# Altium PCB CW308T_PIC24FJ.PcbDoc
Units mil, origin at the board's own origin, x right, y up, seen from the top; angles counter-clockwise.
Board outline 2060 x 2540 mil, 2 copper layers (Top Layer, Bottom Layer); 9 components, 16 nets, 111 pads, 8 vias.
Unrouted connection lines stored in the file: 28.
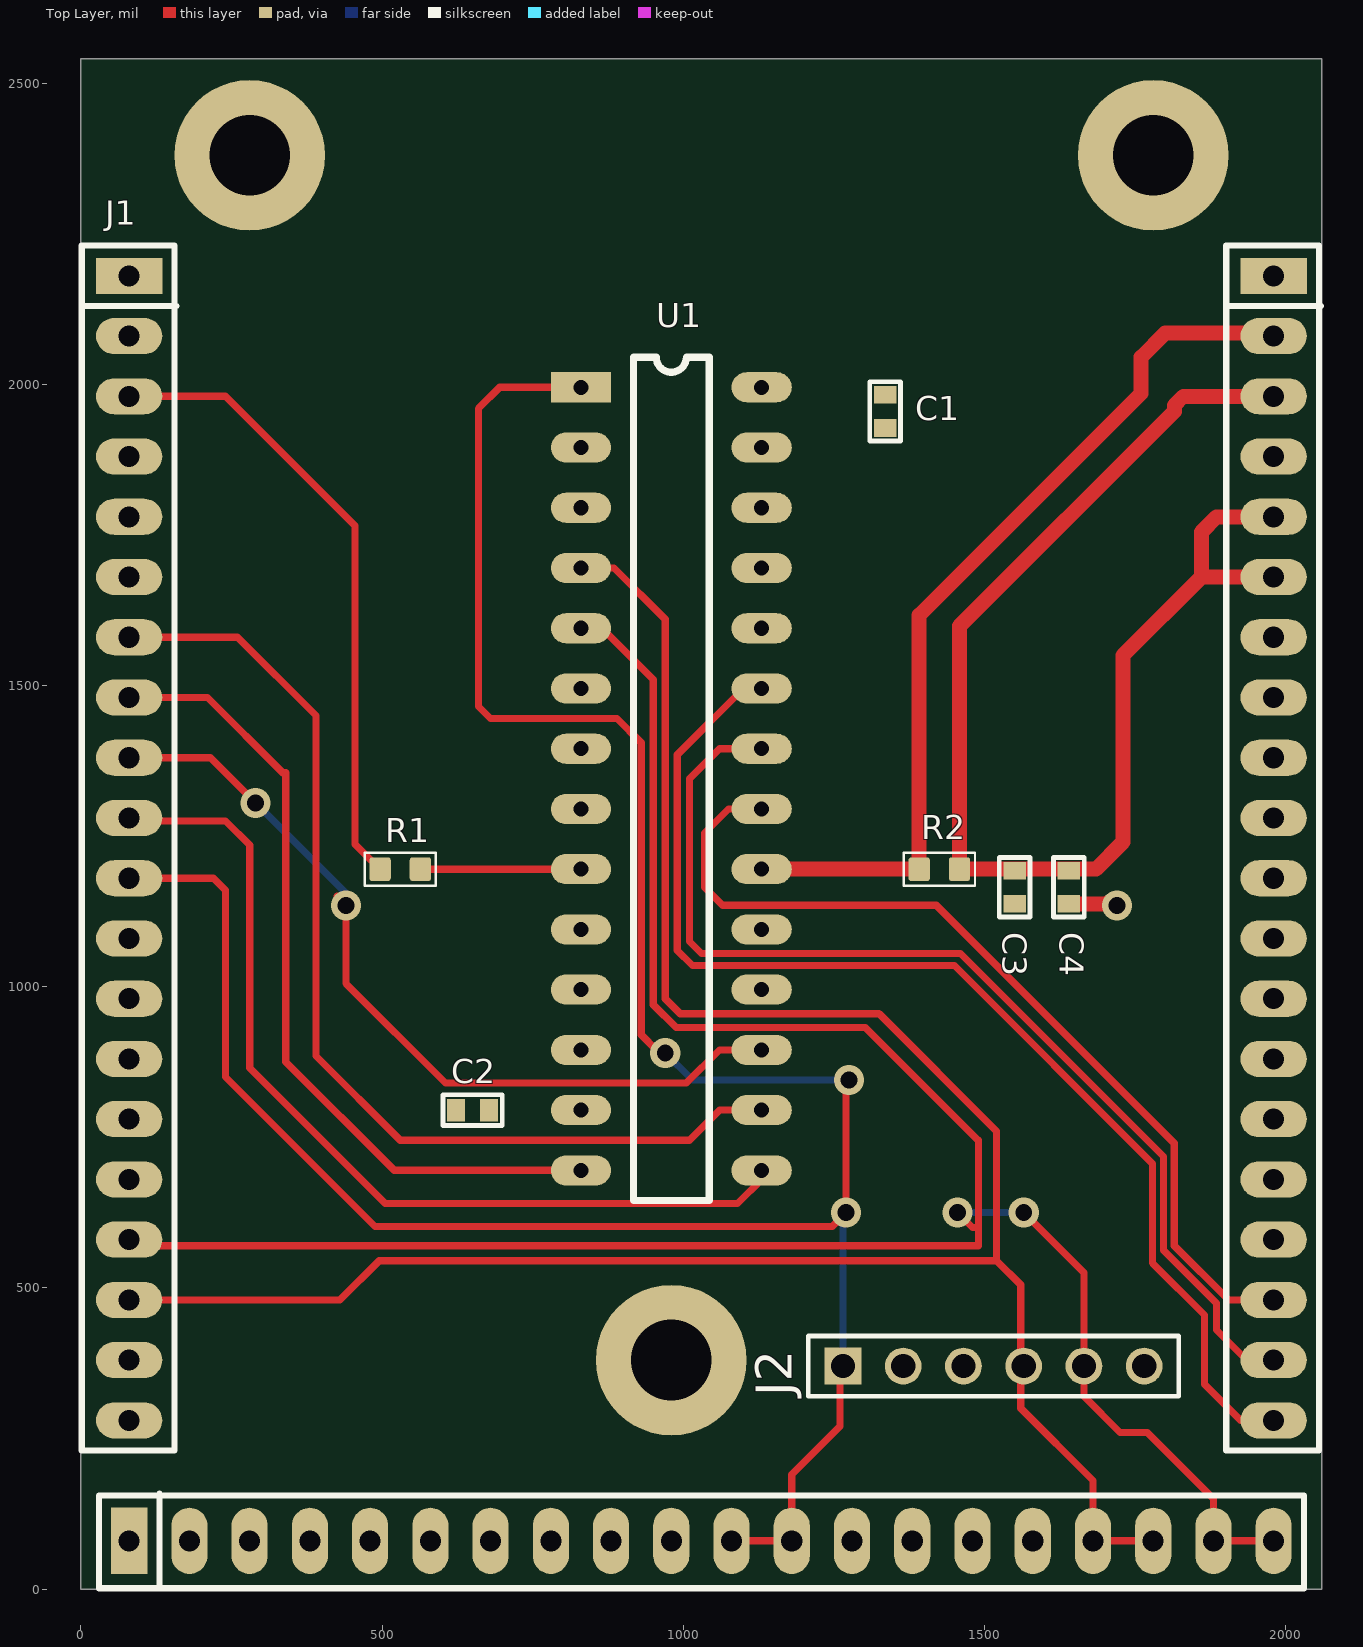
[diagram p0: Top Layer view]
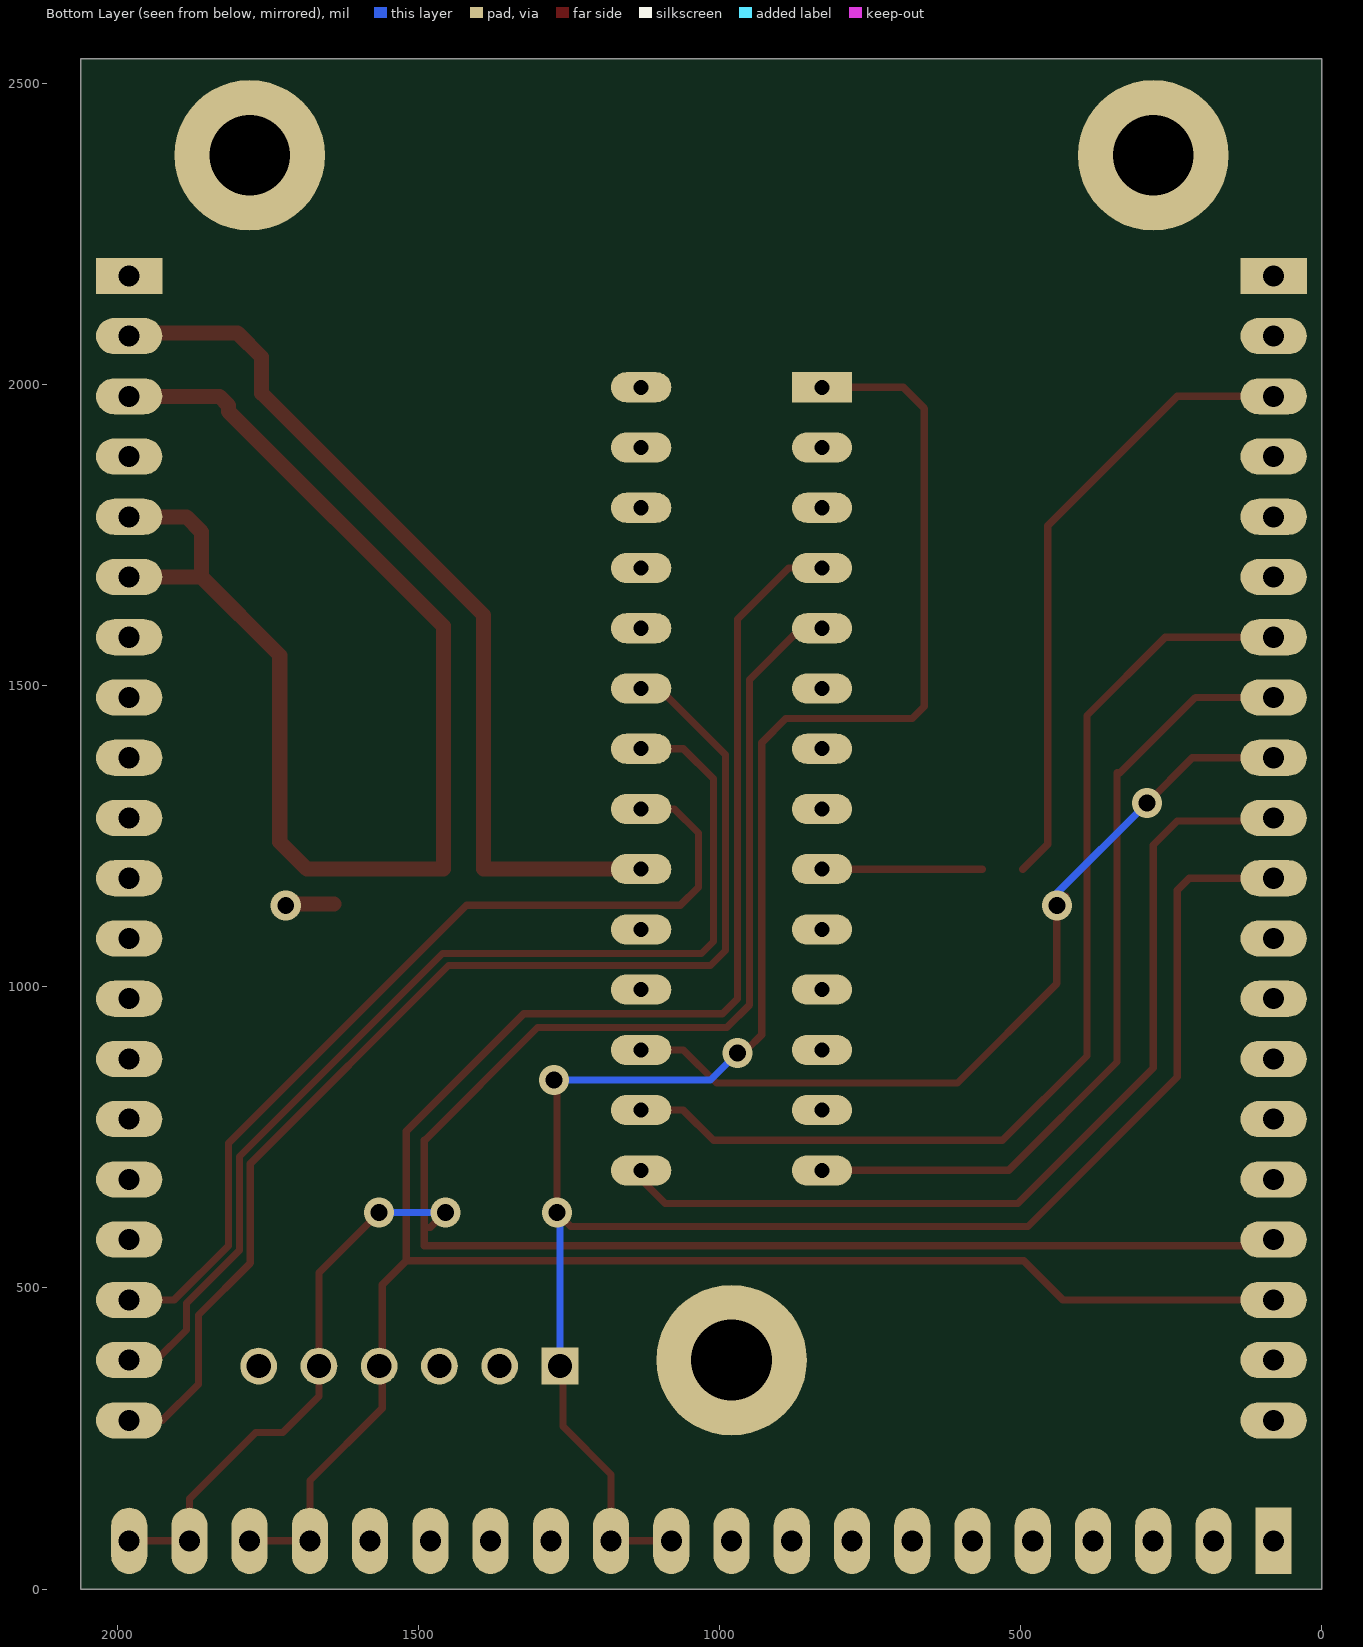
[diagram p1: Bottom Layer view, seen from below]

## Layer stack, top to bottom
Top Solder: solder mask 0.4, Solder Resist, Dk 3.5
Top Layer: signal copper 1.4
Dielectric 1: dielectric 12.6, FR-4, Dk 4.8
Bottom Layer: signal copper 1.4
Bottom Solder: solder mask 0.4, Solder Resist, Dk 3.5

## Board outline
0,0 2060,0 2060,2540 0,2540

## Design rules (kind name [scope] priority, off if disabled: settings)
BoardOutlineClearance [All] p1: gap=15 ignorepadtopadclearanceinfootprint=FALSE except(0: Arc-SplitContinuation Track-SplitContinuation SMDPad-SplitContinuation THPad-SplitContinuation Via-SplitContinuation Fill-SplitContinuation Poly-SplitContinuation Region-SplitContinuation Text-SplitContinuation)
Clearance [All] p1: gap=6 ignorepadtopadclearanceinfootprint=FALSE except(0: Arc-Hole Track-Hole SMDPad-Hole THPad-Hole Via-Hole Fill-Hole Poly-Hole Region-Hole Text-Hole)
HoleSize [All] p1: absolutevalues=TRUE maxlimit=200 minlimit=1 maxpercent=80.000 minpercent=20.000
MinimumSolderMaskSliver [All] p1: minsoldermaskwidth=5
PlaneConnect PlaneConnect_viaDirect [IsVia] p1: planeconnectstyle=Direct reliefexpansion=20 reliefentries=4 reliefconductorwidth=10 reliefairgap=10
PlaneConnect [All] p2: planeconnectstyle=Relief reliefexpansion=20 reliefentries=4 reliefconductorwidth=10 reliefairgap=10
PolygonConnect PolygonConnect_viaDirect [All vs isVia] p1: connectstyle=Direct reliefconductorwidth=10 reliefentries=4 polygonreliefangle="90 Angle" airgapwidth=10
PolygonConnect [All] p2: connectstyle=Relief reliefconductorwidth=10 reliefentries=4 polygonreliefangle="90 Angle" airgapwidth=10
RoutingVias [All] p1: holewidth=28 width=50 viastyle="Through Hole" minholewidth=28 minwidth=50 maxholewidth=28 maxwidth=50
SilkToSilkClearance [All] p1: silktosilkclearance=5
SilkToSolderMaskClearance [IsPad] p1: minsilkscreentomaskgap=5 clearancetoexposedcopper=TRUE
SolderMaskExpansion [All] p1: expansion=4
Width [All] p1: maxlimit=100 minlimit=6 preferedwidth=8 minimp=50.000000 maximp=50.000000 favimp=50.000000
25 further rules are at their usual default settings.

## Components (designator, comment, footprint, x,y, rotation, side; value= is the part's Value field where it differs from the comment)
C1 "100n" CAPC0603_M 1335,1955 r270 top
C2 "100n" CAPC0603_M 650,795 r180 top
C3 "100n" CAPC0603_M 1550,1165 r270 top
C4 "100n" CAPC0603_M 1640,1165 r270 top
J1 "CW308_TARGETCON" CW308_TBOARD_CONN 80,2180 r0 top locked
J2 "TSW-106-07-L-S" SMTC-TSW-106-07-X-S 1265,370 r0 top
R1 "51R" RESC1608X55N 530,1195 r0 top
R2 "10R" RESC1608X55N 1425,1195 r0 top
U1 "PIC24FJ128GA202-I/SP" DIP28 830,1995 r0 top

## Footprints (in the part's own frame and the unit in brackets; to place one, negate y for a bottom-side part, rotate by r counter-clockwise, add the part's x,y. Pads: shape width x height; smd on the part's side, far side on the other; paste and mask are expansions set on the pad)
CAPC0603_M [mm]
  rect 0.75x0.95 smd: 1(-0.7,0) 2(0.7,0)
  silkscreen extent -1.25,-0.65 1.25,0.65, body extent -0.85,-0.45 0.85,0.45, height 0.9
CW308_TBOARD_CONN [mil]
  rect 110x60 hole 35: A1(0,0) C1(1900,0)
  oval 110x60 hole 35: A2(0,-100) A3(0,-200) A4(0,-300) A5(0,-400) A6(0,-500) A7(0,-600) A8(0,-700) A9(0,-800) A10(0,-900) A11(0,-1000) A12(0,-1100) A13(0,-1200) A14(0,-1300) A15(0,-1400) A16(0,-1500) A17(0,-1600) A18(0,-1700) A19(0,-1800) A20(0,-1900) C2(1900,-100) C3(1900,-200) C4(1900,-300) C5(1900,-400) C6(1900,-500) C7(1900,-600) C8(1900,-700) C9(1900,-800) C10(1900,-900) C11(1900,-1000) C12(1900,-1100) C13(1900,-1200) C14(1900,-1300) C15(1900,-1400) C16(1900,-1500) C17(1900,-1600) C18(1900,-1700) C19(1900,-1800) C20(1900,-1900)
  rect 60x110 hole 35: B1(0,-2100)
  oval 60x110 hole 35: B2(100,-2100) B3(200,-2100) B4(300,-2100) B5(400,-2100) B6(500,-2100) B7(600,-2100) B8(700,-2100) B9(800,-2100) B10(900,-2100) B11(1000,-2100) B12(1100,-2100) B13(1200,-2100) B14(1300,-2100) B15(1400,-2100) B16(1500,-2100) B17(1600,-2100) B18(1700,-2100) B19(1800,-2100) B20(1900,-2100)
  round 250 hole 134: MH1(200,200) MH2(900,-1800) MH2(1700,200)
  silkscreen extent -79,-2179 1979,50, body extent -50,-2149 1950,50, height 48
DIP28 [mil]
  rect 100x50 hole 25: 1(0,0)
  oval 100x50 hole 25: 2(0,-100) 3(0,-200) 4(0,-300) 5(0,-400) 6(0,-500) 7(0,-600) 8(0,-700) 9(0,-800) 10(0,-900) 11(0,-1000) 12(0,-1100) 13(0,-1200) 14(0,-1300) 15(300,-1300) 16(300,-1200) 17(300,-1100) 18(300,-1000) 19(300,-900) 20(300,-800) 21(300,-700) 22(300,-600) 23(300,-500) 24(300,-400) 25(300,-300) 26(300,-200) 27(300,-100) 28(300,0)
  silkscreen extent 87,-1350 213,50
RESC1608X55N [mm] "Chip Resistor, Body 1.6x0.8mm, EIA 0603, IPC Medium Density"
  round 0.254 on Mech15: 0(0,0)
  rrect25% 0.9x1 smd: 1(-0.85,0) 2(0.85,0)
  Top Layer pour cut-out: -0.6,0.5 -0.4,0.7 0.4,0.7 0.6,0.5 0.6,-0.5 0.4,-0.7 -0.4,-0.7 -0.6,-0.5
  silkscreen extent -1.5,-0.7 1.5,0.7, body extent -0.87,-0.47 0.88,0.48, height 0.54
SMTC-TSW-106-07-X-S [mm] ".025 SQ Post Terminal Strip Assembly, 1x6 Pins, Vertical, 2.54mm Pitch, Male"
  rect 1.55x1.55 hole 1.02: 1(0,0)
  round 1.55 hole 1.02: 2(2.54,0) 3(5.08,0) 4(7.62,0) 5(10.16,0) 6(12.7,0)
  silkscreen extent -1.46,-1.27 14.16,1.27, body extent -1.27,-1.24 13.97,1.3, height 8.38

## Part data
C1 C2 C3 C4: library part CCHIP-100n-0603, "100n, 0603", Case-EIA=0603, Case-Metric=1608, Component Group=Capacitor, Component Type=Standard, Mounting Technology=SMT, Part Number=CCHIP-100n-0603, Pin Count=2
J1: library part CW308_TBOARD, "CW308 \"Standard\" Target Board Connector", Component Group=Mechanical, Component Type=Standard, Mounting Technology=Through-hole, Part Number=CW308_TBOARD, Pin Count=60, Pitch=2.54mm
J2: library part CMP-1024-00386-1, Manufacturer=Samtec, Temperature Range="-55 to 125 degC", ComponentLink1Description="Manufacturer URL", ComponentLink1URL=http://www.samtec.com, ComponentLink2Description=Datasheet, ComponentLink2URL=http://www.samtec.com/documents/webfiles/pdf/TSW_TH.PDF, ComponentLink3Description="Package Specification", ComponentLink3URL=http://www.samtec.com/documents/webfiles/cpdf/TSW-XXX-XX-XXX-X-XX-XXX-MKT.pdf, DatasheetVersion=F-214, Mounting Technology=Through-hole, Orientation=Vertical, PackageDescription=".025[0.64] SQ. Post Terminal Strip Assembly", PackageReference=TSW-106-07-X-S, PackageVersion="DM, 8/1988", PartNumber=TSW-106-07-L-S, Pitch="2.54 mm", RoHS=True
R1: library part RCHIP-51R-0603, "51R res, 0603, 1%, 1/10W", Case-EIA=0603, Case-Metric=1608, Manufacture 1=Yageo, Manufacture Part Number 1=RC0603FR-0751RL, Rated Power=0.1W, Rated Voltage=75VDC, Supplier Part Number 1=311-51.0HRCT-ND, Temperature Range="-55C to 155C", Tolerance=1%, Component Group=Resistor, Component Type=Standard, Mounting Technology=SMT, Part Number=RCHIP-51R-0603, Pin Count=2, Supplier 1=Digi-Key
R2: library part RCHIP-10R-0603, "10R res, 0603, 1%, 1/10W", Case-EIA=0603, Case-Metric=1608, Manufacture 1=Yageo, Manufacture Part Number 1=RC0603FR-0710RL, Rated Power=0.1W, Rated Voltage=75VDC, Supplier Part Number 1=311-10.0HRCT-ND, Temperature Range="-55C to 155C", Tolerance=1%, Component Group=Resistor, Component Type=Standard, Mounting Technology=SMT, Part Number=RCHIP-10R-0603, Pin Count=2, Supplier 1=Digi-Key
U1: "PIC24FJ, Hardware AES", Manufacture 1=Microchip, Supplier Part Number 1=PIC24FJ128GA202-I/SP-ND, Component Group="Digital IC", Component Type=Standard, Manufacture Part Number 1=PIC24FJ128GA202-I/SP, Mounting Technology=SMT, Part Number=PIC24FJ128GA202-I/SP, Pin Count=44, Supplier 1=Digi-Key

## Via types
v1: diameter 50, hole 28, Top Layer to Bottom Layer, 8 vias

## Nets (pads, with @x,y where several pads share a name; then routed paths per layer and width w, separated by ;. In a path a pad name is that pad's centre, name@x,y a point inside that pad or via, vN(x,y) a via of type N, cw(c..) or ccw(c..) an arc to the next point about the centre after c; other vN are vias at no path point)
GND: C1.2 C2.2 C3.2 C4.2 J1.A2 J1.A4 J1.A6 J1.A15 J1.A16 J1.B15 J1.B16 J1.C1 J1.C4 J1.C7 J1.C9 J1.C10 J1.C16 J1.C17 J2.3 U1.8 U1.27 | length 83.1
  Top Layer w25: C4.2 1702.44,1137.44 1705,1140 1715,1140 v1(1720,1135)
GPIO1: J1.A7 U1.16 | length 1747.5
  Top Layer w12: J1.A7 260,1580 390,1450 390,885 530,745 1010,745 1060,795 U1.16
GPIO2: J1.A8 U1.14 | length 1356.3
  Top Layer w12: J1.A8 210,1480 335,1355 340,1355 340,875 520,695 U1.14
GPIO3: J1.A9 U1.17 | length 1405.5
  Top Layer w12: J1.A9 215,1380 v1(290,1305) ; v1@425,1150 v1(440,1135) 440,1005 605,840 1005,840 1060,895 U1.17
  Bottom Layer w12: v1(290,1305) 440,1155 v1(440,1135)
GPIO4: J1.A10 U1.15 | length 1563.4
  Top Layer w12: J1.A10 85,1275 240,1275 280,1235 280,865 505,640 1090,640 1130,680 U1.15
LED1: J1.C18 U1.21 | length 1529.9
  Top Layer w12: U1.21 1075,1295 1035,1255 1035,1165 1065,1135 1420,1135 1815,740 1815,570 1905,480 J1.C18
LED2: J1.C19 U1.22 | length 1785.7
  Top Layer w12: U1.22 1060,1395 1010,1345 1010,1075 1030,1055 1460,1055 1797,718 1797,562.54 1885,474.54 1885,430 1935,380 J1.C19
LED3: J1.C20 U1.23 | length 1987.7
  Top Layer w12: U1.23 1100,1495 990,1385 990,1060 1015,1035 1450,1035 1779,706 1779,541 1865,455 1865,340 1925,280 J1.C20
NetC3_1: C3.1 C4.1 J1.C3 J1.C5 J1.C6 R2.2 | length 2198.3
  Top Layer w25: J1.C6 1860,1680 ; J1.C5 1885,1780 1860,1755 1860,1680 ; J1.C3 1830,1980 1815,1965 1815,1955 1458.46,1598.46 R2.2 1685,1195 1730,1240 1730,1550 1860,1680
NetJ1_A3: J1.A3 R1.1 | length 1051.3
  Top Layer w12: J1.A3 240,1980 455,1765 455,1236.54 R1.1
NetJ1_C2: J1.C2 R2.1 U1.20 | length 1502.8
  Top Layer w25: U1.20 R2.1 1391.54,1616.54 1760,1985 1760,2045 1800,2085 1975,2085 J1.C2
NetR1_2: R1.2 U1.9 | length 266.5
  Top Layer w12: R1.2 U1.9
NRST: J1.A11 J1.B11 J1.B12 J2.1 U1.1 | length 4360.3
  Top Layer w12: J1.A11 220,1180 240,1160 240,850 488,602 1247,602 v1(1270,625) 1270,840 v1(1275,845) ; U1.1 695,1995 660,1960 660,1465 680,1445 890,1445 930,1405 930,920 955,895 965,895 v1(970,890) ; J1.B11 J1.B12 1180,190 1260,270 1260,365 J2.1
  Bottom Layer w12: v1(970,890) 1015,845 v1(1275,845) ; J2.1 1265,620 v1(1270,625)
PGC: J1.A17 J1.B19 J1.B20 J2.5 U1.5 | length 3874.7
  Top Layer w12: J1.A17 90,570 1490,570 1490,600 ; U1.5 865,1595 950,1510 950,970 988,932 1302,932 1489,745 1490,745 1490,600 ; v1(1455,625) 1480,600 1490,600 ; v1(1565,625) 1665,525 J2.5 1665,320 1725,260 1770,260 1880,150 J1.B19 J1.B20
  Bottom Layer w12: v1(1455,625) v1(1565,625)
PGD: J1.A18 J1.B17 J1.B18 J2.4 U1.4 | length 3759.5
  Top Layer w12: J1.A18 430,480 495,545 1520,545 ; U1.4 885,1695 970,1610 970,980 995,955 1325,955 1520,760 1520,545 ; J1.B18 J1.B17 1680,180 1560,300 1560,505 1520,545
VCC: C1.1 C2.1 J1.A20 J1.B13 J1.B14 J1.C14 J2.2 U1.13 U1.28
pads on no net: J1.A1 J1.A5 J1.A12 J1.A13 J1.A14 J1.A19 J1.B1 J1.B2 J1.B3 J1.B4 J1.B5 J1.B6 J1.B7 J1.B8 J1.B9 J1.B10 J1.C8 J1.C11 J1.C12 J1.C13 J1.C15 J1.MH1 J1.MH2 J2.6 R1.0 R2.0 U1.2 U1.3 U1.6 U1.7 U1.10 U1.11 U1.12 U1.18 U1.19 U1.24 U1.25 U1.26

## Silkscreen, mask and mechanical layers (free items; w line width, h text height)
Mechanical 1:
  the board outline again, w10